# Altium PCB advsensor.PcbDoc (part 1 of 2)
Units mil, origin at the board's own origin, x right, y up, seen from the top; angles counter-clockwise.
Board outline 6000 x 4000 mil, 4 copper layers (Top Layer, Mid-Layer 1, Mid-Layer 2, Bottom Layer); 107 components, 107 nets, 544 pads, 87 vias.
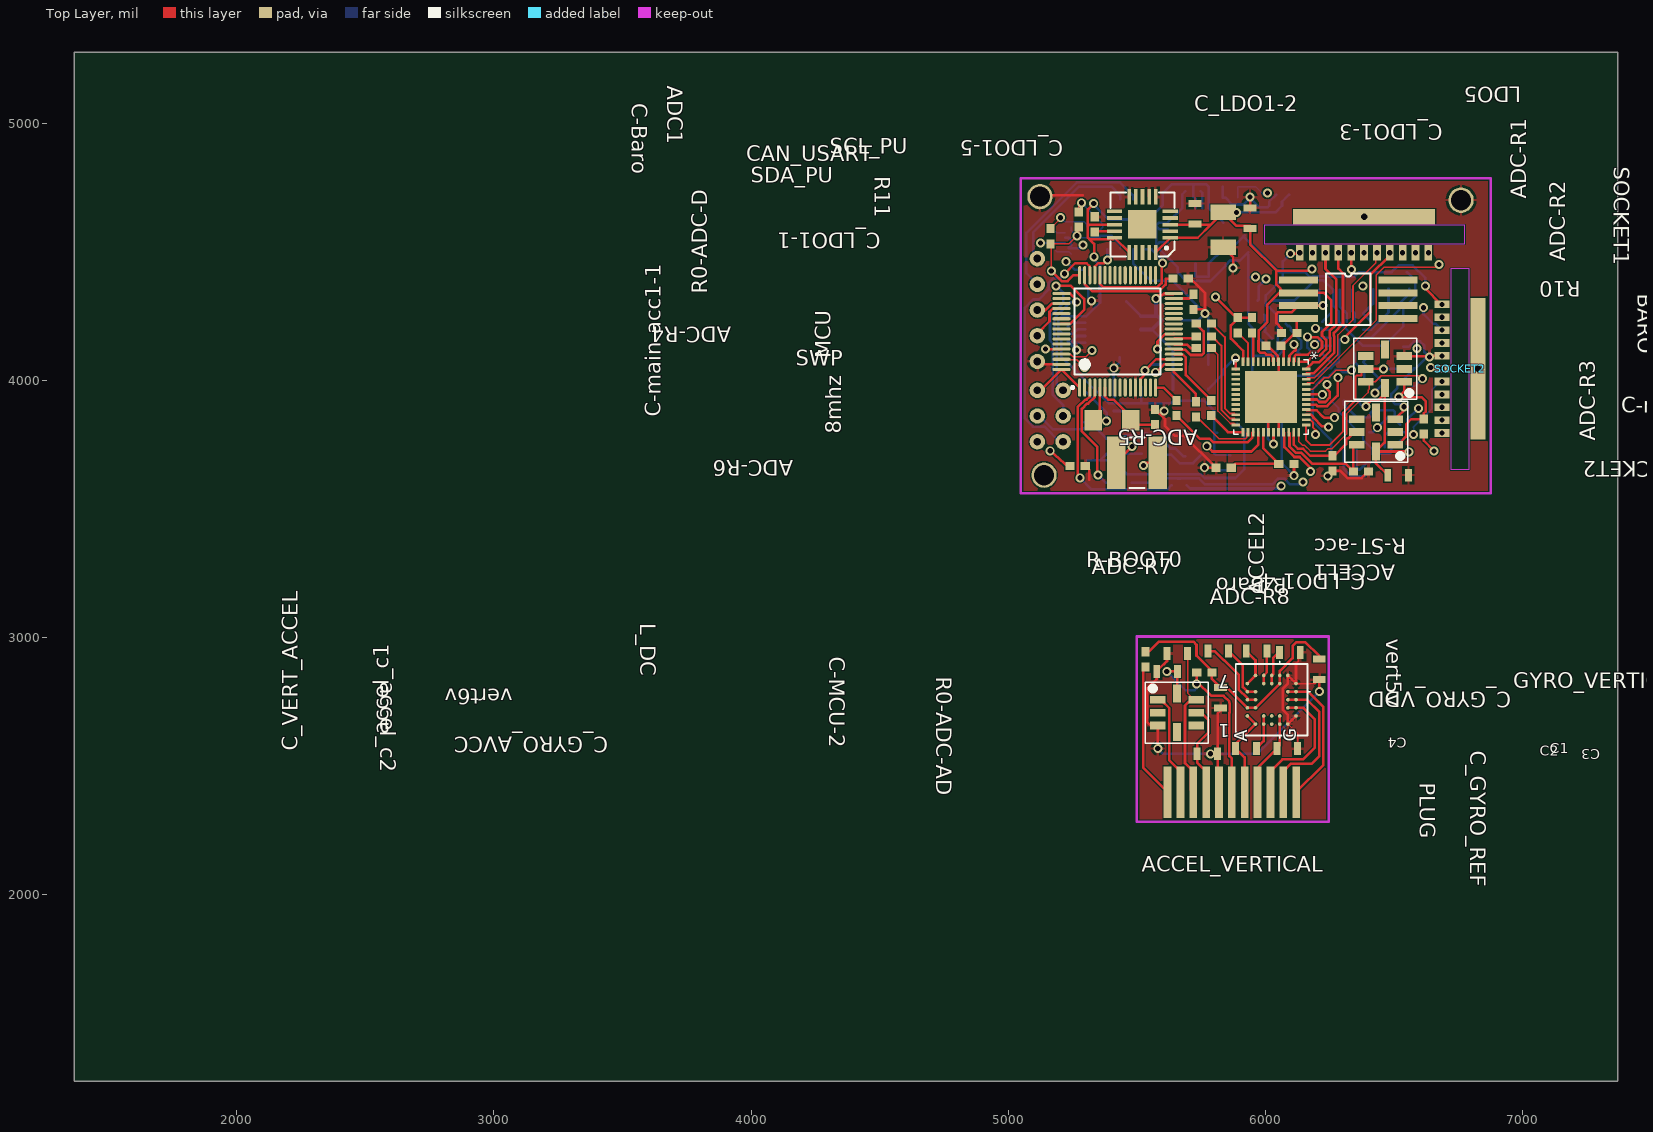
[diagram p0: Top Layer view]
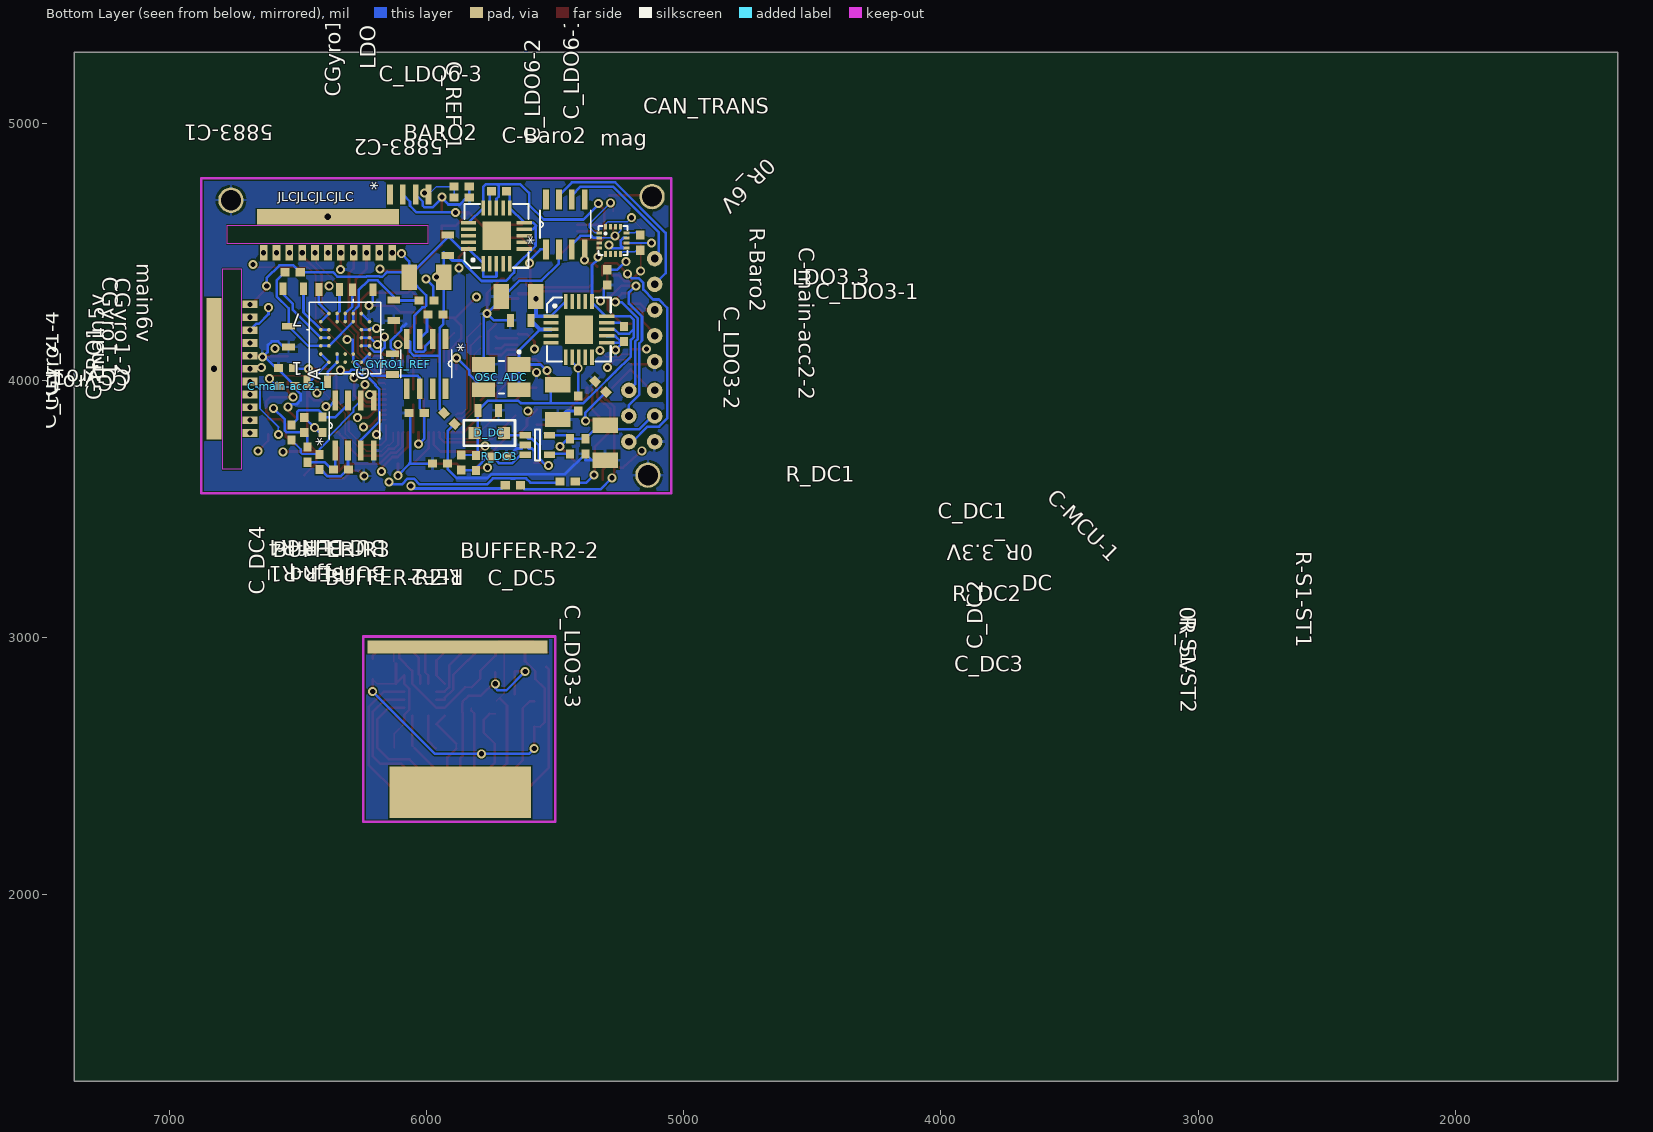
[diagram p1: Bottom Layer view, seen from below]
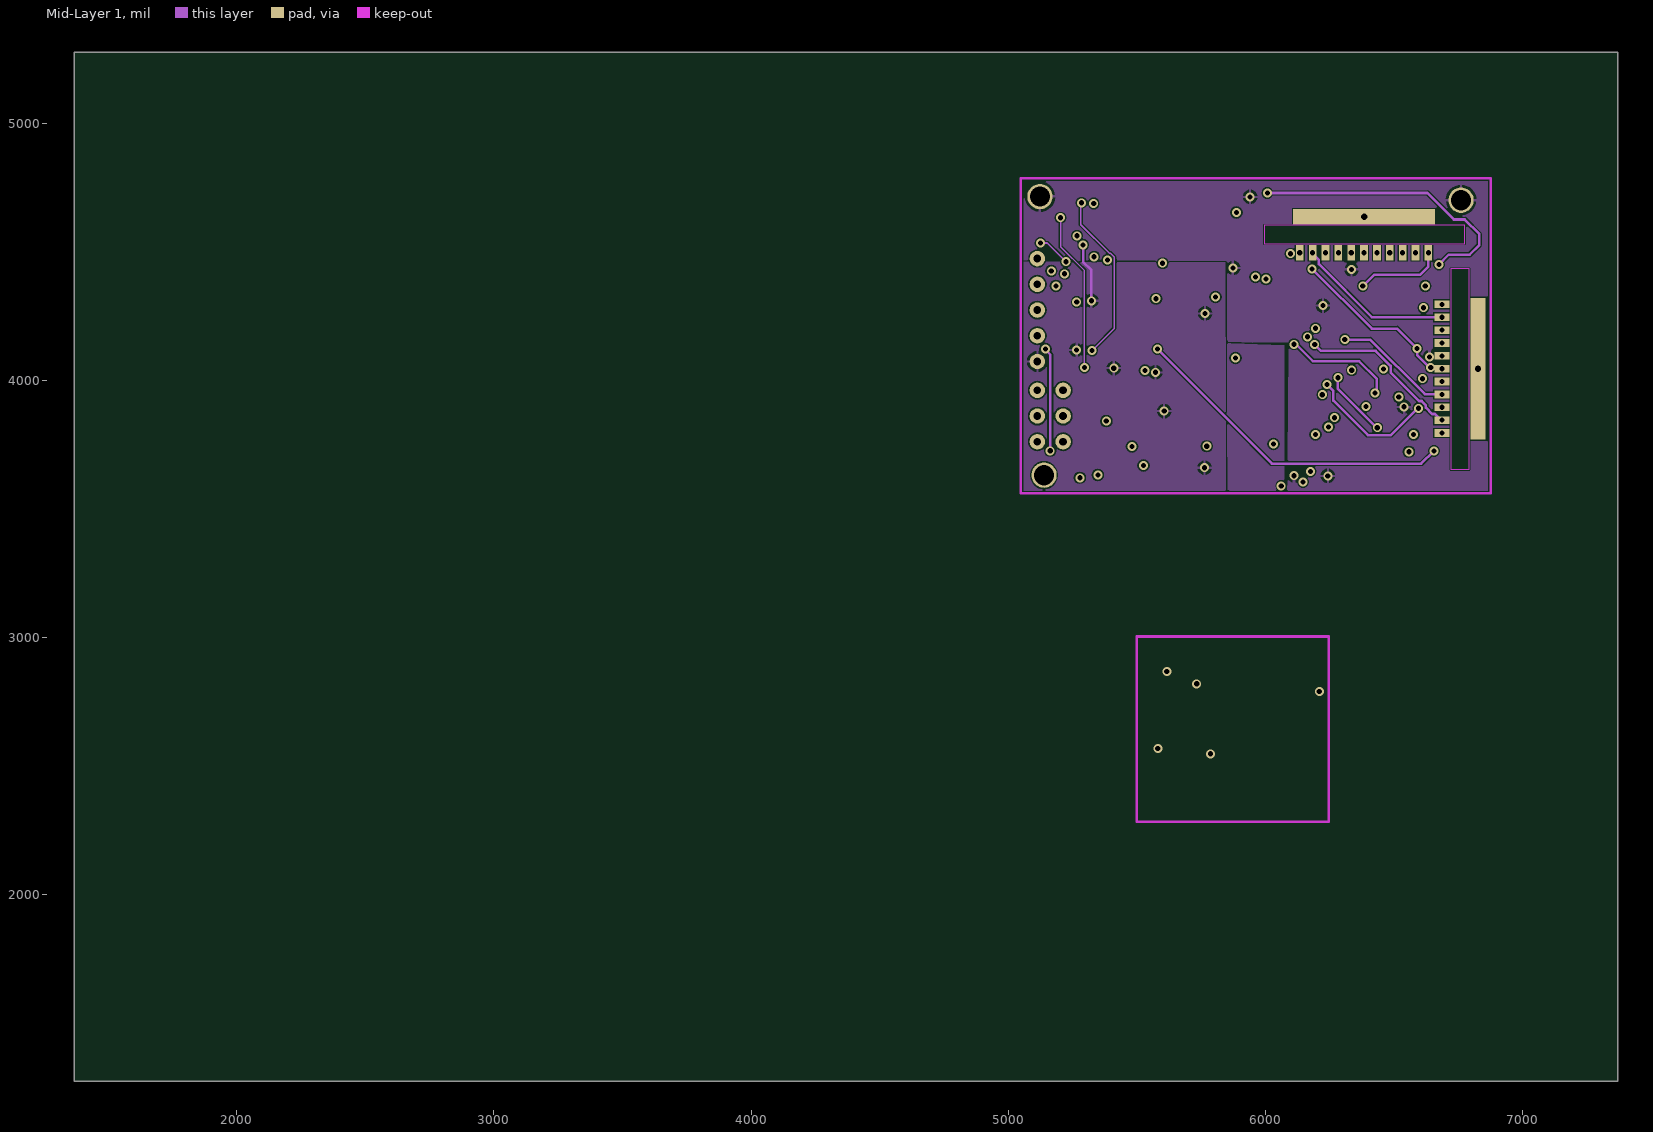
[diagram p2: Mid-Layer 1]
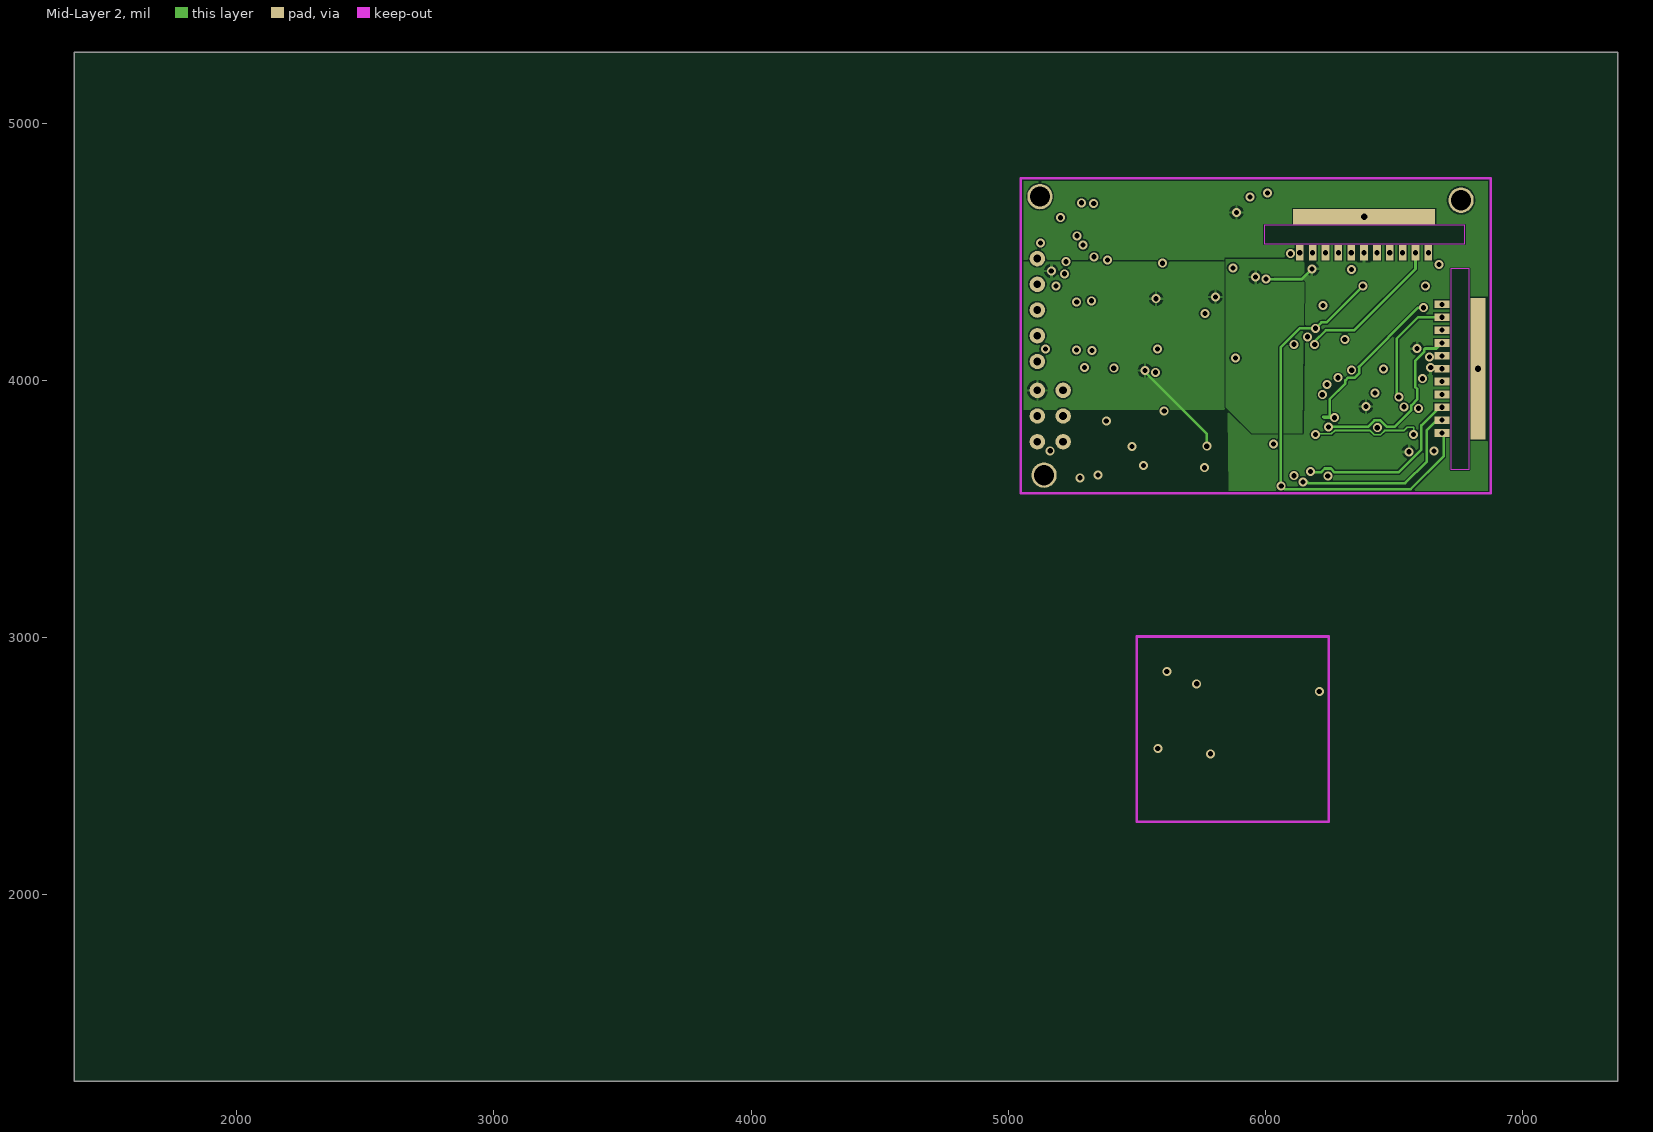
[diagram p3: Mid-Layer 2]

## Layer stack, top to bottom
Top Layer: signal copper 1.4
Dielectric: core 12.6, FR-4, Dk 4.8
Mid-Layer 1: signal copper 1.4
Dielectric: prepreg 12.6, FR-4, Dk 4.8
Mid-Layer 2: signal copper 1.4
Dielectric: core 12.6, FR-4, Dk 4.8
Bottom Layer: signal copper 1.4

## Board outline
1369,1275 7369,1275 7369,5275 1369,5275

## Design rules (kind name [scope] priority, off if disabled: settings)
Clearance [All] p1: gap=6
MinimumSolderMaskSliver [All] p1 off: minsoldermaskwidth=10
PolygonConnect [All] p1: connectstyle=Relief reliefconductorwidth=10 reliefentries=4 polygonreliefangle="90 Angle" airgapwidth=10
RoomDefinition power [InComponentClass('power')] p1: confinementstyle=ConfineIn formatcopy=TRUE lockcomponents=FALSE outline 5021,3500 4275,3500 4275,3039 5021,3039
RoomDefinition advsensor_vertical [InComponentClass('advsensor_vertical')] p2: confinementstyle=ConfineIn formatcopy=TRUE lockcomponents=FALSE outline 5008,2797 4663,2797 4663,2647 5008,2647
RoomDefinition advsensor_main [InComponentClass('advsensor_main')] p3: confinementstyle=ConfineIn formatcopy=TRUE lockcomponents=FALSE outline 7341,3515 6901,3515 6901,3019 7341,3019
RoutingVias [All] p1: holewidth=20 width=35 viastyle="Through Hole" minholewidth=20 minwidth=35 maxholewidth=20 maxwidth=50
SilkToSilkClearance [All] p1 off: silktosilkclearance=10
SilkToSolderMaskClearance [IsPad] p1 off: minsilkscreentomaskgap=10 clearancetoexposedcopper=TRUE
SolderMaskExpansion [All] p1: expansion=2.05
Width Width_1 [All] p1: maxlimit=20 minlimit=6 preferedwidth=10
Width PowerLineWidth [(InNet('GND') OR InNet('GND-3.3') OR InNet('GND-5.0') OR InNet('GND-6.0') OR InNet('GND-DC') OR InNet('VCC') OR InNet('VCC5V') OR InNet('VCC6V') OR InNet('VCC-3.3'))] p2: maxlimit=10 minlimit=10 preferedwidth=10
25 further rules are at their usual default settings.

## Classes and differential pairs
component class advsensor_main: 8mhz 5883-C1 5883-C2 ACCEL1 ACCEL2 ADC1 ADC-R1 ADC-R2 ADC-R3 ADC-R4 ADC-R5 ADC-R6 ADC-R7 ADC-R8 BARO BARO2 buffer BUFFER-R1 BUFFER-R2-1 BUFFER-R2-2 BUFFER-R3 BUFFER-R4 C-Baro C-Baro2 C-Buffer C-main-acc1-1 C-main-acc1-2 C-main-acc2-1 C-main-acc2-2 C-MCU-1 C-MCU-2 C_GYRO1_REF CAN_TRANS CAN_USART CGyro1-1 CGyro1-2 CGyro1-3 CGyro1-4 CGyro1-AVCC CGyro1-VDD GYRO1 mag main5v main6v MCU OSC_ADC R0-ADC-AD R0-ADC-D R10 R11 R-Baro R-Baro2 R-BOOT0 R-S1-ST1 R-S1-ST2 R-ST-acc SCL_PU SDA_PU SOCKET1 SOCKET2 SWP
component class advsensor_vertical: accel_c1 accel_c2 ACCEL_VERTICAL C1 C2 C3 C4 C_GYRO_AVCC C_GYRO_REF C_GYRO_VDD C_VERT_ACCEL GYRO_VERTICAL PLUG vert5v vert6v
component class power: 0R_3.3V 0R_5V 0R_6V C_DC1 C_DC2 C_DC3 C_DC4 C_DC5 C_LDO1-1 C_LDO1-2 C_LDO1-3 C_LDO1-4 C_LDO1-5 C_LDO3-1 C_LDO3-2 C_LDO3-3 C_LDO6-1 C_LDO6-2 C_LDO6-3 C_REF_1 C_REF_2 D_DC DC L_DC LDO3.3 LDO5 LDO6 R_DC1 R_DC2 R_DC3 REF2

## Components (designator, comment, footprint, x,y, rotation, side; value= is the part's Value field where it differs from the comment)
0R_3.3V "" "0603 - no" 5410,3910 r270 bottom
0R_5V "" "0603 - no" 5947,3676 r180 bottom
0R_6V "" "0603 - no" 5910.93,3851.25 r225 bottom
8mhz "XTAL" 5032 5403,3845 r180 top
5883-C1 "" "0603 - no" 5297,4400 r270 bottom
5883-C2 "" "0603 - no" 5169,4535 r270 bottom
ACCEL1 "ADXL203CE" ADXL203 6504,3849 r180 top
ACCEL2 "ADXL203CE" ADXL203 6539,4094 r180 top
accel_c1 "Cap" 0805 5774,2548 r180 top
accel_c2 "Cap" 0805 5657,2938 r0 top
ACCEL_VERTICAL "ADXL203CE" ADXL203 5581,2658 r0 top
ADC1 "ADS1258_RTC_48" "RTC48_5P1X5P1 - weak" 6021,3935 r270 top
ADC-R1 "" "0603 - no" 5760,4220 r180 top
ADC-R2 "" "0603 - no" 5760,4170 r180 top
ADC-R3 "" "0603 - no" 5760,4125 r180 top
ADC-R4 "" "0603 - no" 5654,3892 r270 top
ADC-R5 "" "0603 - no" 5729,3887 r270 top
ADC-R6 "" "0603 - no" 5789,3892 r270 top
ADC-R7 "" "0603 - no" 5892,4214 r90 top
ADC-R8 "" "0603 - no" 5947,4214 r90 top
BARO "MPXH6115" MPXH6115 6128,4390 r0 top
BARO2 "MPXH6115" "D8 - HALF" 6067,4819 r90 bottom
buffer "OPA2227" D8 6280,3824 r90 bottom
BUFFER-R1 "" "0603 - no" 6415,3682 r270 bottom
BUFFER-R2-1 "" "0603 - no" 6332,3653 r0 bottom
BUFFER-R2-2 "" "0603 - no" 6524,3797 r270 bottom
BUFFER-R3 "" "0603 - no" 6463,3711 r90 bottom
BUFFER-R4 "" "0603 - no" 6404,3827 r270 bottom
C1 "Cap" 0805 5816,2947 r0 top
C2 "Cap" 0805 5965,2947 r0 top
C3 "Cap" 0805 6095,2942 r180 top
C4 "Cap" 0805 5924,2569 r180 top
C-Baro "" "0603 - no" 6092,4184 r0 top
C-Baro2 "" "0603 - no" 5863,4710 r0 bottom
C-Buffer "" "0603 - no" 6475,3826 r270 bottom
C-main-acc1-1 "" "0603 - no" 6371,3646 r180 top
C-main-acc1-2 "" "0603 - no" 6261,3677 r90 top
C-main-acc2-1 "" "0603 - no" 6541,3977 r0 bottom
C-main-acc2-2 "" "0603 - no" 6546,4047 r180 bottom
C-MCU-1 "" "0603 - no" 5323,3975 r225 bottom
C-MCU-2 "" "0603 - no" 5571,3857 r270 top
C_DC1 "" 1210 5305,3757 r90 bottom
C_DC2 "" "0603 - no" 5381.77,3743.35 r90 bottom
C_DC3 "" "0603 - no" 5864.77,3680.35 r90 bottom
C_DC4 "" 0805 5760,3882 r0 bottom
C_DC5 "" 1210 5490,3915 r90 bottom
C_GYRO1_REF "" 0805 6132,4063 r90 bottom
C_GYRO_AVCC "" 0805 5825,2766 r270 top
C_GYRO_REF "" 0805 6085,2569 r0 top
C_GYRO_VDD "" 0805 6209,2877 r270 top
C_LDO1-1 "" "0603 - no" 5336,4606 r270 top
C_LDO1-2 "Cap2" 1210 5835,4585 r90 top
C_LDO1-3 "" 0805 5940,4630 r270 top
C_LDO1-4 "" 0805 6515,3631 r180 top
C_LDO1-5 "" 0805 5726,4648 r270 top
C_LDO3-1 "" "0603 - no" 5232,4180 r90 bottom
C_LDO3-2 "Cap2" 1210 5642,4326 r180 bottom
C_LDO3-3 "" 0805 5634,4233 r180 bottom
C_LDO6-1 "" "0603 - no" 5718,4735 r0 bottom
C_LDO6-2 "Cap2" 1210 6000,4401 r0 bottom
C_LDO6-3 "" 0805 5917,4525 r90 bottom
C_REF_1 "" "0603 - no" 5965,4255 r180 bottom
C_REF_2 "" "0603 - no" 6038,3873 r0 bottom
C_VERT_ACCEL "" 0805 5617,2868 r180 top
CAN_TRANS "SN65HVD230_D_8" D8 5460,4606 r90 bottom
CAN_USART "5P" 5P 5113,4173 r90 top
CGyro1-1 "Cap" 0805 6518,4356 r180 bottom
CGyro1-2 "Cap" 0805 6378,4353 r180 bottom
CGyro1-3 "" 0805 6248,4352 r0 bottom
CGyro1-4 "Cap" 0805 6424,3994 r0 bottom
CGyro1-AVCC "" 0805 6536,4170 r270 bottom
CGyro1-VDD "" 0805 6127,4272 r270 bottom
D_DC "Diode" Diode-SOD123 5755.77,3795.35 r0 bottom
DC "LM27313XMF/NOPB" DBV0005A 5568.77,3748.35 r180 bottom
GYRO1 "ADXRS620BBGZ" BG_32_3 6316,4165 r90 bottom
GYRO_VERTICAL "ADXRS620BBGZ" BG_32_3 6024,2758 r90 top
L_DC "Inductor Iron Dot" GDNR5040 5500,3680 r0 top
LDO3.3 "TPS7A4700" "TPS7A4700 - b" 5506,4249 r180 bottom
LDO5 "TPS7A4700" "TPS7A4700 - b" 5620,4554 r180 top
LDO6 "TPS7A4700" "TPS7A4700 - b" 5779,4463 r90 bottom
mag "HMC5883" HMC5883 5328,4573 r180 bottom
main5v "" "0603 - no" 6000,4310 r0 bottom
main6v "" "0603 - no" 6520,4420 r180 bottom
MCU "STM32F103RBT6" LQFP64_N 5425,4190 r90 top
OSC_ADC "OSC" SMD4_5X32 5709,4012 r270 bottom
PLUG "HUGE3" BIG 5819,2399 r0 top
R0-ADC-AD "" "0603 - no" 6081,3675 r0 top
R0-ADC-D "" "0603 - no" 5837,3660 r180 top
R10 "" "0603 - no" 5720,4305 r270 top
R11 "" "0603 - no" 5670,4395 r0 top
R-Baro "" "0603 - no" 6030.84,4134 r180 top
R-Baro2 "" "0603 - no" 5863,4753 r180 bottom
R-BOOT0 "" "0603 - no" 5269.7,3667 r0 top
R-S1-ST1 "" "0603 - no" 5451,3606 r180 bottom
R-S1-ST2 "" "0603 - no" 5664,3592 r180 bottom
R-ST-acc "" "0603 - no" 6615,3820 r270 top
R_DC1 "" "0603 - no" 5441.77,3743.35 r90 bottom
R_DC2 "" "0603 - no" 5806.77,3678.35 r90 bottom
R_DC3 "" "0603 - no" 5717.77,3704.35 r0 bottom
REF2 "MAX6350" D8 6001,4064 r270 bottom
SCL_PU "" "0603 - no" 5274,4625 r90 top
SDA_PU "" "0603 - no" 5164,4560 r90 top
SOCKET1 "HUGE3" "BIG - socket2" 6333,4542 r0 top
SOCKET2 "HUGE3" "BIG - socket2" 6732,4095 r270 top
SWP "SWPConnector" SWPConnector 5113,3861 r90 top
vert5v "" "0603 - no" 5762,2864 r0 top
vert6v "" "0603 - no" 5534,2915 r270 top

## Footprints (in the part's own frame and the unit in brackets; to place one, negate y for a bottom-side part, rotate by r counter-clockwise, add the part's x,y. Pads: shape width x height; smd on the part's side, far side on the other; paste and mask are expansions set on the pad)
5P [mil]
  round 60 hole 30: 1(-100,0) 2(0,0) 3(100,0) 4(200,0) 5(300,0)
"0603 - no" [mm]
  rect 0.9x0.8 smd: 1(-0.75,0) 2(0.75,0)
0805 [mil]
  rect 27x50 smd: 1(-40,0) 2(40,0)
1210 [mm]
  rect 1.52x2.5 smd: 1(-1.715,0) 2(1.715,0)
5032 [mm]
  rect 1.7x2 smd: 1(-1.85,0) 2(1.85,0)
ADXL203 [mil]
  rect 60x30 smd: 1(0,100) 2(0,50) 3(0,0) 5(150,0) 6(150,50) 7(150,100)
  rect 30x70 smd: 4(75,-25) 8(75,125)
  silkscreen extent -49,-69 197,167
BG_32_3 [mil]
  round 14 smd: A2(-62.99,94.49) A3(-31.5,94.49) A4(0,94.49) A5(31.5,94.49) A6(62.99,94.49) B1(-94.49,62.99) B3(-31.5,62.99) B4(0,62.99) B5(31.5,62.99) B7(94.49,62.99) C1(-94.49,31.5) C2(-62.99,31.5) C6(62.99,31.5) C7(94.49,31.5) D1(-94.49,0) D2(-62.99,0) D6(62.99,0) D7(94.49,0) E1(-94.49,-31.5) E2(-62.99,-31.5) E6(62.99,-31.5) E7(94.49,-31.5) F1(-94.49,-62.99) F3(-31.5,-62.99) F4(0,-62.99) F5(31.5,-62.99) F7(94.49,-62.99) G2(-62.99,-94.49) G3(-31.5,-94.49) G4(0,-94.49) G5(31.5,-94.49) G6(62.99,-94.49)
  silkscreen extent -149,-149 149,149
BIG [mil]
  rect 30x200 smd: 1(-150,0) 2(-100,0) 3(-50,0) 4(100,0) 5(150,0) 6(200,0) 6V(-200,0) 7(250,0) 8(300,0) VCC(50,0) VSS(0,0)
  rect 551.18x200 smd far side: FREE(50,0)
"BIG - socket2" [mil]
  rect 30x59.06 hole 20: 1(-150,-46) 2(-100,-46) 3(-50,-46) 4(100,-46) 5(150,-46) 6(200,-46) 6V(-200,-46) 7(250,-46) 8(300,-46) VCC(50,-46) VSS(0,-46)
  rect 551.18x59.06 hole 25: FREE(50,94)
  Keep-Out Layer region: -338.15,-11.06 441.3,-11.06 441.3,59.8 -338.15,59.8
D8 [mil]
  rect 78x22 smd: 1(-97,75) 2(-97,25) 3(-97,-25) 4(-97,-75) 5(97,-75) 6(97,-25) 7(97,25) 8(97,75)
  silkscreen extent -54,-98 54,98
"D8 - HALF" [mil]
  rect 78x22 smd: 1(-97,75) 2(-97,25) 3(-97,-25) 4(-97,-75)
DBV0005A [mm]
  rect 1.1x0.65 smd paste-0.102 mask+0.051: 1(-1.2,0.95) 2(-1.2,0) 3(-1.2,-0.95) 4(1.2,-0.95) 5(1.2,0.95)
  silkscreen extent -0.25,-1.55 0.25,1.55
Diode-SOD123 [mm]
  rect 1.2x1.2 smd: 1(-1.45,0) 2(1.45,0)
  silkscreen extent -2.54,-1.27 2.54,1.27
GDNR5040 [mm]
  rect 1.85x5.2 smd: 1(-2.05,0) 2(2.05,0)
  silkscreen extent -0.75,-2.5 0.75,2.5
HMC5883 [mm]
  rect 0.575x0.3 smd: 1(0,0) 2(0,-0.5) 3(0,-1) 4(0,-1.5) 9(2.7,-1.5) 10(2.7,-1) 11(2.7,-0.5) 12(2.7,0)
  rect 0.3x0.575 smd: 5(0.6,-2.1) 6(1.1,-2.1) 7(1.6,-2.1) 8(2.1,-2.1) 13(2.1,0.6) 14(1.6,0.6) 15(1.1,0.6) 16(0.6,0.6)
  silkscreen extent -0.09,-2.19 2.79,0.69
LQFP64_N [mm]
  oval 1.8x0.3 smd: 1(-5.55,3.75) 2(-5.55,3.25) 3(-5.55,2.75) 4(-5.55,2.25) 5(-5.55,1.75) 6(-5.55,1.25) 7(-5.55,0.75) 8(-5.55,0.25) 9(-5.55,-0.25) 10(-5.55,-0.75) 11(-5.55,-1.25) 12(-5.55,-1.75) 13(-5.55,-2.25) 14(-5.55,-2.75) 15(-5.55,-3.25) 16(-5.55,-3.75) 33(5.55,-3.75) 34(5.55,-3.25) 35(5.55,-2.75) 36(5.55,-2.25) 37(5.55,-1.75) 38(5.55,-1.25) 39(5.55,-0.75) 40(5.55,-0.25) 41(5.55,0.25) 42(5.55,0.75) 43(5.55,1.25) 44(5.55,1.75) 45(5.55,2.25) 46(5.55,2.75) 47(5.55,3.25) 48(5.55,3.75)
  oval 0.3x1.8 smd: 17(-3.75,-5.55) 18(-3.25,-5.55) 19(-2.75,-5.55) 20(-2.25,-5.55) 21(-1.75,-5.55) 22(-1.25,-5.55) 23(-0.75,-5.55) 24(-0.25,-5.55) 25(0.25,-5.55) 26(0.75,-5.55) 27(1.25,-5.55) 28(1.75,-5.55) 29(2.25,-5.55) 30(2.75,-5.55) 31(3.25,-5.55) 32(3.75,-5.55) 49(3.75,5.55) 50(3.25,5.55) 51(2.75,5.55) 52(2.25,5.55) 53(1.75,5.55) 54(1.25,5.55) 55(0.75,5.55) 56(0.25,5.55) 57(-0.25,5.55) 58(-0.75,5.55) 59(-1.25,5.55) 60(-1.75,5.55) 61(-2.25,5.55) 62(-2.75,5.55) 63(-3.25,5.55) 64(-3.75,5.55)
  silkscreen extent -5.67,-4.25 4.25,4.57
MPXH6115 [mm]
  rect 3.81x0.69 smd: 1(0,0) 2(0,-1.27) 3(0,-2.54) 4(0,-3.81) 5(9.83,-3.81) 6(9.83,-2.54) 7(9.83,-1.27) 8(9.83,0)
  silkscreen extent 2.74,-4.44 7.09,0.64
"RTC48_5P1X5P1 - weak" [mm]
  rect 0.85x0.28 smd paste-0.14: 1(-3.475,2.75) 2(-3.475,2.25) 3(-3.475,1.75) 4(-3.475,1.25) 5(-3.475,0.75) 6(-3.475,0.25) 7(-3.475,-0.25) 8(-3.475,-0.75) 9(-3.475,-1.25) 10(-3.475,-1.75) 11(-3.475,-2.25) 12(-3.475,-2.75) 25(3.475,-2.75) 26(3.475,-2.25) 27(3.475,-1.75) 28(3.475,-1.25) 29(3.475,-0.75) 30(3.475,-0.25) 31(3.475,0.25) 32(3.475,0.75) 33(3.475,1.25) 34(3.475,1.75) 35(3.475,2.25) 36(3.475,2.75)
  rect 0.28x0.85 smd paste-0.14: 13(-2.751,-3.475) 14(-2.251,-3.475) 15(-1.75,-3.475) 16(-1.25,-3.475) 17(-0.75,-3.475) 18(-0.25,-3.475) 19(0.25,-3.475) 20(0.75,-3.475) 21(1.25,-3.475) 22(1.75,-3.475) 23(2.251,-3.475) 24(2.751,-3.475) 37(2.751,3.475) 38(2.251,3.475) 39(1.75,3.475) 40(1.25,3.475) 41(0.75,3.475) 42(0.25,3.475) 43(-0.25,3.475) 44(-0.75,3.475) 45(-1.25,3.475) 46(-1.75,3.475) 47(-2.251,3.475) 48(-2.751,3.475)
  rect 5.1x5.1 smd paste-2.537 mask-2.54: 49(0,0)
  silkscreen extent -3.68,-3.68 3.68,3.68
SMD4_5X32 [mm]
  rect 1.45x2.25 smd: 1(-1.25,1.75) 2(-1.25,-1.75) 3(1.25,-1.75) 4(1.25,1.75)
  silkscreen extent -2.62,-0.25 1.6,1.87
SWPConnector [mil]
  round 60 hole 30: 1(-100,0) 2(0,0) 3(100,0) 4(-100,-100) 5(0,-100) 6(100,-100)
"TPS7A4700 - b" [mm]
  rect 2.8x2.8 smd: 0(2.515,-1.321)
  rect 1.5x0.35 smd: 1(-0.25,0) 2(-0.25,-0.65) 3(-0.25,-1.3) 4(-0.25,-1.95) 5(-0.25,-2.6) 11(5.25,-2.6) 12(5.25,-1.95) 13(5.25,-1.3) 14(5.25,-0.65) 15(5.25,0)
  rect 0.35x1.5 smd: 6(1.2,-4.05) 7(1.85,-4.05) 8(2.5,-4.05) 9(3.15,-4.05) 10(3.8,-4.05) 16(3.8,1.45) 17(3.15,1.45) 18(2.5,1.45) 19(1.85,1.45) 20(1.2,1.45)
  silkscreen extent -0.65,-4.45 5.65,1.85

## Part data
0R_3.3V 0R_5V 0R_6V ADC-R1 ADC-R2 ADC-R3 ADC-R4 ADC-R5 ADC-R6 ADC-R7 ADC-R8 BUFFER-R1 BUFFER-R2-1 BUFFER-R2-2 BUFFER-R3 BUFFER-R4 main5v main6v R0-ADC-AD R0-ADC-D R10 R11 R-Baro R-Baro2 R-BOOT0 R-S1-ST1 R-S1-ST2 R-ST-acc R_DC1 R_DC2 R_DC3 SCL_PU SDA_PU vert5v vert6v: library part Res2, "Resistor"
8mhz: "Crystal Oscillator"
5883-C1 5883-C2: library part "Cap Semi", "Capacitor (Semiconductor SIM Model)"
ACCEL1 ACCEL2 ACCEL_VERTICAL ADC1 CAN_TRANS DC GYRO1 GYRO_VERTICAL: "Imported"
accel_c1 accel_c2 C1 C2 C3 C4 C_LDO1-2 C_LDO3-2 C_LDO6-2 CGyro1-1 CGyro1-2 CGyro1-4: "Capacitor"
C-Baro C-Baro2 C-Buffer C-main-acc1-1 C-main-acc1-2 C-main-acc2-1 C-main-acc2-2 C-MCU-1 C-MCU-2 C_DC2 C_DC3 C_DC4 C_GYRO1_REF C_GYRO_AVCC C_GYRO_REF C_GYRO_VDD C_LDO1-1 C_LDO1-3 C_LDO1-4 C_LDO1-5 C_LDO3-1 C_LDO3-3 C_LDO6-1 C_LDO6-3 C_REF_1 C_REF_2 C_VERT_ACCEL CGyro1-3 CGyro1-AVCC CGyro1-VDD: library part Cap, "Capacitor"
C_DC1 C_DC5: library part Cap2, "Capacitor"
D_DC: "Default Diode"
L_DC: "Magnetic-Core Inductor with Winding Polarity Marking"
MCU: "STM32 ARM-based 32-bit MCU with 128 Kbytes Flash, 64-pin LQFP, Industrial Temperature"

## Free pads (board coordinates)
  round 98.43 hole 78.74: 0(5139,3631) 1(6760,4700) 2(5123,4714)
  rect 700x50 smd far side: 0(5879,2963)

## Via types
v1: diameter 35, hole 20, Top Layer to Bottom Layer, 87 vias

## Nets (pads, with @x,y where several pads share a name; then routed paths per layer and width w, separated by ;. In a path a pad name is that pad's centre, name@x,y a point inside that pad or via, vN(x,y) a via of type N, cw(c..) or ccw(c..) an arc to the next point about the centre after c; other vN are vias at no path point)
DC_OUT: C_DC3.2 C_DC4.2 C_DC5.2 D_DC.2 LDO3.3.13 LDO3.3.15 LDO3.3.16 LDO5.13 LDO5.15 LDO5.16 LDO6.13 LDO6.15 LDO6.16 R_DC2.2 | length 2972.7
  Top Layer w10: v1(5332,4687) 5309.25,4664.25 5309.25,4598.74 ; v1(5333.78,4479.93) 5333.78,4529.67 5315.7,4547.76 ; LDO5.13@5413.31,4605.18 5315.7,4605.19 5309.25,4598.74 ; LDO5.16@5470.39,4496.91 LDO5.15@5413.31,4554 5407.06,4547.76 5315.7,4547.76 ; 5309.25,4598.74 5309.25,4554.2 5315.7,4547.76
  Bottom Layer w10: LDO3.3.13@5299.31,4197.82 5269.31,4197.82 5252.3,4180.81 5211.7,4180.81 5194,4198.51 ; v1(5332,4687) 5332,4683 5390,4625 5544,4625 5601,4682 5601,4728 5634.75,4761.75 5725.26,4761.75 ; v1(5333.78,4479.93) 5333.78,4470.22 5356.39,4447.61 LDO3.3.16@5356.39,4306.09 5356.39,4302.09 5303.31,4249 LDO3.3.15@5299.31,4249 5209,4249 5194,4234 5194,4198.51 ; C_DC5.2@5516,3975.52 5516,3910.81 ; LDO6.13@5727.82,4669.69 5727.82,4705.69 5718.81,4714.7 5718.81,4755.3 5725.26,4761.75 ; R_DC2.2@5800,3714.65 D_DC.2@5800,3795.35 ; R_DC2.2@5806.83,3709.81 C_DC3.2@5862.77,3707.88 ; D_DC.2@5812.85,3795.35 D_DC.2@5800,3795.35 ; LDO6.16@5836.09,4612.61 LDO6.15@5779,4669.69 5779,4752.55 5769.8,4761.75 5725.26,4761.75 ; 5194,4198.51 5194,4167.73 5205.25,4156.48 5205.25,4092.75 5266.35,4031.65 5267.5,4031.65 5337.93,3961.22 5339.29,3961.22 5389.7,3910.81 5516,3910.81 ; 5516,3910.81 5633.18,3910.81 5642.37,3920 5762,3920 C_DC4.2@5800,3882 D_DC.2@5800,3795.35
GND-3.3: 0R_3.3V.1 5883-C1.2 C-MCU-1.1 C-MCU-2.1 C_LDO3-1.1 C_LDO3-2.1 C_LDO3-3.1 CAN_TRANS.2 CAN_USART.1 LDO3.3.7 LDO3.3.8 LDO3.3.11 LDO3.3.12 mag.9 mag.11 MCU.12 MCU.18 MCU.63 OSC_ADC.2 R0-ADC-D.2 R10.2 R11.2 R-BOOT0.2 | length 2358.8
  Top Layer w10: CAN_USART.1@5113,4073 5123.95,4062.05 MCU.63@5206.5,4062.05 ; v1@5291,4522 v1(5291,4526) ; R-BOOT0.2@5299.23,3667 5315,3651.23 5315,3613 ; C-MCU-2.1@5571,3886.53 5609,3848.53 5609,3822.37 5647.37,3784 5683.47,3784 R0-ADC-D.2@5807.47,3660 v1(5763,3660) ; v1(5572,4031) 5575,4031 5606.05,4062.05 MCU.18@5643.5,4062.05 ; R11.2@5699.53,4395 5708.55,4395 5764.53,4339.02 v1@5764.53,4275.47 ; R10.2@5720,4275.47 v1@5764.53,4275.47 ; v1@5764.53,4260.47 v1@5764.53,4275.47
  Mid-Layer 1 w10: v1(5291,4526) 5291,4460 5323,4428 v1(5323,4309)
  Bottom Layer w10: mag.11@5221.7,4553.31 5234.8,4553.31 5234.8,4550.54 5237.58,4550.54 5244.02,4544.09 5244.02,4523.17 5237.58,4516.72 5234.8,4516.72 5234.8,4513.94 5278.94,4513.94 v1(5291,4526) ; v1(5264.47,4118) C_LDO3-1.1@5235.84,4146.64 ; 5883-C1.2@5297,4370.47 5310,4357.47 5310,4322 v1(5323,4309) ; LDO3.3.11@5299.31,4146.64 C_LDO3-1.1@5235.84,4146.64 ; LDO3.3.12@5299.31,4172.23 5266.35,4172.23 5244.59,4150.47 C_LDO3-1.1@5232,4150.47 C_LDO3-1.1@5235.84,4146.64 ; 0R_3.3V.1@5414.53,3935 0R_3.3V.1@5410,3939.53 v1(5410,4047) 5433.17,4070.17 LDO3.3.7@5433.17,4089.55 ; CAN_TRANS.2@5485,4509 5485,4454 5552,4387 5638,4387 v1(5765,4260) ; v1@5572,4020.93 v1(5572,4031) ; C_LDO3-3.1@5674,4233 5738,4233 v1(5765,4260) ; OSC_ADC.2@5777.9,4061.21 5777.9,4247.1 v1(5765,4260)
  other v1: 5606,3880
GND-5.0: 0R_5V.1 ACCEL1.3 ACCEL2.3 ADC1.5 ADC1.30 ADC1.32 ADC1.49 BARO2.3 BARO.3 buffer.4 C-Baro2.1 C-Baro.1 C-main-acc1-1.1 C-main-acc1-2.1 C-main-acc2-1.1 C-main-acc2-2.1 C_GYRO1_REF.2 C_LDO1-1.1 C_LDO1-2.1 C_LDO1-3.1 C_LDO1-4.1 C_LDO1-5.1 C_REF_2.2 CGyro1-3.1 CGyro1-AVCC.2 CGyro1-VDD.2 GYRO1.F1 GYRO1.F7 GYRO1.G2 GYRO1.G6 LDO5.6 LDO5.7 LDO5.10 pad.1 pad.2 R0-ADC-AD.2 R-Baro2.2 R-Baro.2 SOCKET1.VSS SOCKET2.VSS | length 3001.7
  Top Layer w10: pad.2@5123,4714 5127.5,4718.5 5288.81,4718.5 ; C_LDO1-2.1@5835,4517.48 5874,4478.48 v1(5874,4437) ; C_LDO1-3.1@5940,4659.53 C_LDO1-3.1@5940,4670 v1(5940,4713) ; R-Baro.2@6001.31,4134 6009.4,4134 6047.35,4096.04 6047.35,4074.98 ADC1.5@6050.53,4071.81 ADC1.49@6050.53,3964.53 ; ADC1.30@6011.16,3798.19 ADC1.49@6011.16,3925.16 ; ADC1.32@6050.53,3798.19 ADC1.49@6050.53,3905.47 ; C-Baro.1@6062.47,4184 6062.47,4201.39 6042,4221.86 6042,4258.14 6048.44,4264.58 6102.58,4264.58 BARO.3@6128,4290 v1(6223,4290) ; R0-ADC-AD.2@6110.53,3675 6110.53,3629.47 v1(6111,3629) ; v1(6242,3628.47) C-main-acc1-2.1@6261,3647.47 6290.98,3647.47 6319.2,3619.25 6373.78,3619.25 C-main-acc1-1.1@6400.53,3646 C-main-acc1-1.1@6411.69,3646 ; SOCKET1.VSS@6333,4492 6333,4432 v1(6334,4431) ; ACCEL1.3@6504,3849 6551.91,3896.91 v1(6538,3896.91) ; ACCEL2.3@6539,4094 6633,4094 v1(6637,4090) ; v1@6632,4095 SOCKET2.VSS@6682,4095
  Bottom Layer w10: R-Baro2.2@5833.47,4753 C-Baro2.1@5833.47,4710 5843.51,4710 5870.25,4683.25 5914.8,4683.25 v1@5940,4708.45 ; v1(5940,4713) v1@5940,4708.45 ; 0R_5V.1@5976.53,3676 6067.53,3676 ; BARO2.3@6042,4722 6014,4694 6014,4678.44 6007.56,4672 5976.44,4672 v1@5940,4708.44 ; C_REF_2.2@6067.53,3873 6062.25,3867.72 6062.25,3681.28 6067.53,3676 ; 6078,4220 6087,4211 6091.56,4211 6098,4204.56 6098,4193.69 6139.5,4152.19 6139.5,4128.19 C_GYRO1_REF.2@6122.81,4111.5 ; v1(6111,3629) 6111,3630 6067.53,3673.47 6067.53,3676 ; C_GYRO1_REF.2@6123.5,4111.5 C_GYRO1_REF.2@6132,4103 ; CGyro1-3.1@6208,4352 6208,4305 v1(6223,4290) ; GYRO1.G2@6221.51,4102.01 GYRO1.F1@6253.01,4070.51 ; GYRO1.G6@6221.51,4227.99 GYRO1.F7@6253.01,4259.49 GYRO1.F7@6253.01,4259.99 ; CGyro1-AVCC.2@6536,4130 6555.69,4130 6577.19,4151.5 6600.81,4151.5 6617.5,4134.81 6617.5,4109.5 v1(6637,4090) ; v1(6538,3896.91) 6528.66,3906.25 6506.05,3906.25 6489.36,3922.95 6489.36,3946.56 6511.47,3968.67 C-main-acc2-1.1@6511.47,3977 6575.53,4041.05 C-main-acc2-2.1@6575.53,4047 6584,4047 v1@6632,4095
GND-6.0: 0R_6V.1 C_LDO6-1.1 C_LDO6-2.1 C_LDO6-3.1 C_REF_1.2 LDO6.6 LDO6.7 LDO6.9 LDO6.10 LDO6.11 REF2.4 | length 1696.9
  Top Layer w10: v1(5961,4401) v1@5969.69,4401
  Bottom Layer w10: LDO6.7@5619.55,4535.83 5587.83,4535.83 5575,4523 ; LDO6.9@5619.55,4587.02 5587.98,4587.02 5575,4600 ; C_LDO6-1.1@5688.47,4735 5676.64,4723.17 LDO6.11@5676.64,4669.69 LDO6.10@5619.55,4612.61 5585.61,4612.61 5574,4601 5575,4600 ; 0R_6V.1@5931.81,3872.13 5948,3888.32 5948,4095.58 ; C_LDO6-3.1@5932,4497 5900.5,4465.5 5862.19,4465.5 5845.5,4448.81 5845.5,4445.87 5785.63,4386 5744.21,4386 5744,4386.21 5691.61,4386.21 5658.75,4419.07 5658.75,4439.25 5575,4523 ; C_LDO6-3.1@5932.48,4487.99 C_LDO6-2.1@5932.48,4401 ; v1(5961,4401) C_LDO6-2.1@5932.48,4401 ; REF2.4@6076,4161 6064,4149 6064,4110.82 6048.18,4095 5948.58,4095 5948,4095.58 ; 5575,4523 5575,4600 ; C_LDO6-2.1@5932.48,4401 5932.48,4257.99 C_REF_1.2@5935.47,4255 5935.47,4217.08 5948,4204.56 5948,4095.58
GND-ADC-D: ADC1.29 R0-ADC-AD.1 R0-ADC-D.1 | length 339.2
  Top Layer w10: R0-ADC-D.1@5866.53,3660 5881.53,3675 R0-ADC-AD.1@6051.47,3675 5991.47,3735 ADC1.29@5991.47,3798.19
GND-DC: 0R_3.3V.2 0R_5V.2 0R_6V.2 C_DC1.1 C_DC2.1 C_DC4.1 C_DC5.1 DC.2 pad.0@5139,3631 R_DC3.1 SWP.1 | length 1114.4
  Bottom Layer w10: C_DC1.1@5305,3689.48 5357.42,3689.48 ; 5383.4,3689.48 5357.42,3689.48 ; 0R_3.3V.2@5410,3880.47 5457.01,3880.47 C_DC5.1@5490,3847.48 ; 5583.36,3728.3 5589.8,3734.75 5602.41,3734.75 DC.2@5616.01,3748.35 5629.62,3734.75 5649.95,3734.75 5680.34,3704.35 R_DC3.1@5688.24,3704.35 ; 0R_6V.2@5890.05,3830.37 5917.47,3802.95 0R_5V.2@5917.47,3676 5917.47,3654.51 5883.07,3620.11 5762.58,3620.11 5747.95,3634.75 5664.63,3634.75 5664,3634.12 5663.37,3634.75 5460.85,3634.75 C_DC2.1@5381.77,3713.83 5357.42,3689.48
Net8mhz_1: 8mhz.1 C-MCU-2.2 MCU.6 | length 267.4
  Top Layer w10: MCU.6@5375.79,3971.5 5375.79,3937.74 5388.47,3925.06 5409.77,3925.06 8mhz.1@5474.83,3860 ; 8mhz.1@5475.83,3845 5493.36,3827.47 C-MCU-2.2@5571,3827.47
Net8mhz_2: 8mhz.2 C-MCU-1.2 MCU.5 | length 329.4
  Top Layer w10: 8mhz.2@5329.17,3860 5356.1,3886.94 MCU.5@5356.1,3971.5 ; 8mhz.2@5330.17,3845 5377,3845 v1(5381,3841)
  Bottom Layer w10: C-MCU-1.2@5302.12,3954.12 5383.25,3872.99 5383.25,3858.2 5387,3854.45 5387,3841 v1(5381,3841)
Net5883-C1_1: 5883-C1.1 mag.10 | length 316
  Mid-Layer 1 w6: v1(5124.63,4533.63) 5151.37,4533.63 v1(5224,4461)
  Bottom Layer w6: v1(5124.63,4533.63) mag.10@5221.7,4533.63 mag.10@5219.26,4531.19 ; v1(5224,4461) v1@5227,4461
  Bottom Layer w10: v1@5227,4461 5258.47,4429.53 5883-C1.1@5297,4429.53
Net5883-C2_1: 5883-C2.1 mag.12 | length 38.6
  Bottom Layer w6: 5185,4577.53 5189.53,4573 mag.12@5221.7,4573
Net5883-C2_2: 5883-C2.2 mag.8 | length 67.2
  Bottom Layer w6: 5883-C2.2@5184,4504.47 5189.43,4499.04 5236.61,4499.04 mag.8@5245.32,4490.32
NetACCEL1_1: ACCEL1.1 ACCEL2.1 R-ST-acc.1 SOCKET1.1 SOCKET2.1 | length 1502.9
  Top Layer w10: ACCEL1.1@6504,3749 6505.5,3750.5 6516.06,3750.5 6546.5,3780.94 6546.5,3828.8 6566.19,3848.5 6613.97,3848.5 R-ST-acc.1@6615,3849.53 6615,3870.7 6623.5,3879.2 6623.5,3917.5 6606.25,3934.75 v1(6517.86,3934.75) 6516.75,3934.75 6539,3957 ACCEL2.1@6539,3994 ACCEL2.1@6539.73,3993.27 ; v1@6504,3934 v1@6516.22,3921.78
  Mid-Layer 1 w10: SOCKET1.1@6183,4492 6207,4468 6207,4451.47 6413.47,4245 SOCKET2.1@6682,4245
  Mid-Layer 2 w10: v1(6517.86,3934.75) 6516.75,3934.75 6516,3934 6510,3940 6510,4162 6593,4245 SOCKET2.1@6682,4245
NetACCEL1_6: ACCEL1.6 ADC1.35 C-main-acc1-2.2 | length 361.2
  Top Layer w10: ADC1.35@6109.58,3798.19 6109.58,3749.42 6125.25,3733.75 6146.06,3733.75 6173.28,3706.53 C-main-acc1-2.2@6261,3706.53 6267.77,3706.53 6313,3751.76 6313,3768.56 6319.44,3775 6323.1,3775 6337,3788.9 6337,3792.56 6343.44,3799 ACCEL1.6@6354,3799
NetACCEL1_7: ACCEL1.7 ADC1.34 C-main-acc1-1.2 | length 453.3
  Top Layer w10: ADC1.34@6089.9,3798.19 6093.07,3795.02 6093.07,3743.3 6118.62,3717.75 6139.43,3717.75 6181.18,3676 6240.51,3676 6240.7,3676.19 6311.28,3676.19 C-main-acc1-1.2@6341.47,3646 6341.47,3736.47 ACCEL1.7@6354,3749
NetACCEL2_6: ACCEL2.6 ADC1.37 C-main-acc2-2.2 | length 647.3
  Top Layer w8: ADC1.37@6157.81,3826.7 6157.81,3767.19 6177,3748 6248,3748 6302,3802 6302,3874.38 6349,3921.38 6349,4013.14 6354.86,4019 6372.54,4019 6373.14,4019.61 6373.14,4037.29 ACCEL2.6@6379.86,4044
  Top Layer w10: ACCEL2.6@6389,4044 v1(6458,4044)
  Bottom Layer w10: v1(6458,4044) 6513.47,4044 C-main-acc2-2.2@6516.47,4047
NetACCEL2_7: ACCEL2.7 ADC1.36 C-main-acc2-1.2 | length 782.6
  Top Layer w6: ADC1.36@6129.27,3798.19 6129.27,3761.73 6143.25,3747.75 6151.85,3747.75 6174.6,3725 6178.66,3724 6208,3724 6233.28,3725 6241.52,3733.24 6257.24,3733.24 6315,3791 6315,3817.73 6315,3869 6398.5,3952.5 6398.5,3960.98 6404,3966.48 6404,3979 ACCEL2.7@6389,3994 6426.27,3994 6449.77,4017.5 6468.98,4017.5 6469.48,4018 6595,4018 v1@6598,4015
  Bottom Layer w6: C-main-acc2-1.2@6570.53,3977 6581,3977 v1(6610,4006)
Netaccel_c1_1: accel_c1.1 accel_c2.1 ACCEL_VERTICAL.3 C3.1 C_GYRO_AVCC.2 C_GYRO_REF.2 C_GYRO_VDD.2 C_VERT_ACCEL.2 GYRO_VERTICAL.F1 GYRO_VERTICAL.F7 GYRO_VERTICAL.G2 GYRO_VERTICAL.G6 PLUG.VSS | length 2213.9
  Top Layer w6: ACCEL_VERTICAL.3@5558,2653 ACCEL_VERTICAL.3@5581,2653 ; accel_c1.1@5814,2548 accel_c1.1@5815,2549 ; C_GYRO_AVCC.2@5825,2715.5 C_GYRO_AVCC.2@5825,2726 ; GYRO_VERTICAL.F1@6086.99,2663.51 6125,2625.5 C_GYRO_REF.2@6125,2569 ; GYRO_VERTICAL.G6@6118.49,2820.99 6192.99,2820.99 C_GYRO_VDD.2@6209,2837 ; 6118.49,2898.51 6126.5,2906.52 6126.5,2937.5 C3.1@6137,2948
  Top Layer w10: ACCEL_VERTICAL.3@5558,2653 5540,2671 5540,2801 5577,2838 C_VERT_ACCEL.2@5577,2868 5577,2869.3 5604.19,2896.5 5605.5,2896.5 5617,2908 accel_c2.1@5617,2938 ; v1(5581,2569) ACCEL_VERTICAL.3@5581,2653 ; v1(5786.5,2548) accel_c1.1@5814,2548 5814,2404 PLUG.VSS@5819,2399 ; accel_c1.1@5815,2549 5815,2705.5 C_GYRO_AVCC.2@5825,2715.5 ; GYRO_VERTICAL.G2@6118.49,2695.01 GYRO_VERTICAL.F1@6086.99,2663.51 6086.99,2699.01 6067,2719 6067,2801.5 6086.99,2821.5 GYRO_VERTICAL.F7@6086.99,2852.49 GYRO_VERTICAL.G6@6118.49,2820.99 6118.49,2898.51 ; v1(6209,2790) C_GYRO_VDD.2@6209,2837
  Bottom Layer w10: v1(5581,2569) 5602,2548 v1(5786.5,2548) 5967,2548 v1(6209,2790)
Netaccel_c1_2: accel_c1.2 ACCEL_VERTICAL.6 PLUG.3 | length 370.2
  Top Layer w6: ACCEL_VERTICAL.6@5731,2703 ACCEL_VERTICAL.6@5755,2703
  Top Layer w10: ACCEL_VERTICAL.6@5755,2703 5778,2680 5778,2631 5734,2587 accel_c1.2@5734,2548 5734,2514.56 5769,2479.56 PLUG.3@5769,2399
Netaccel_c2_2: accel_c2.2 ACCEL_VERTICAL.7 PLUG.2 | length 584.2
  Top Layer w6: accel_c2.2@5697,2938 5697,2784.52 ACCEL_VERTICAL.7@5728.52,2753
  Top Layer w10: ACCEL_VERTICAL.7@5712.79,2761.21 5687,2735.42 5687,2511.56 5710,2488.56 5710,2408 PLUG.2@5719,2399
NetACCEL_VERTICAL_1: ACCEL_VERTICAL.1 PLUG.1 | length 400.4
  Top Layer w10: ACCEL_VERTICAL.1@5581,2753 5598,2753 5626,2725 5626,2522.56 5663,2485.56 5663,2405 PLUG.1@5669,2399
NetACCEL_VERTICAL_8: ACCEL_VERTICAL.8 C_VERT_ACCEL.1 PLUG.VCC vert5v.1 | length 847.7
  Top Layer w10: v1(5616,2868) C_VERT_ACCEL.1@5657,2868 ACCEL_VERTICAL.8@5657,2779 ; vert5v.1@5732.47,2864 5732.47,2829.53 5789,2773 5837,2773 5859.5,2750.5 5859.5,2745.56 5861,2744.06 5861,2707.94 5859.5,2706.44 5859.5,2539.44 5869,2529.94 PLUG.VCC@5869,2399
  Bottom Layer w10: v1(5616,2868) 5689,2795 5724,2795 5732.47,2803.47 v1(5732.47,2820)
NetADC1_2: ADC1.2 GYRO1.F3 GYRO1.G3 | length 382.6
  Top Layer w10: ADC1.2@6109.58,4071.81 6112.76,4074.98 6112.76,4093.1 6119.2,4099.54 6165.87,4099.54 6176.83,4110.5 6202.81,4110.5 6219.5,4127.19 6219.5,4150.81 6202.81,4167.5 6164.5,4167.5 v1(6163,4169)
  Bottom Layer w10: v1(6163,4169) 6162.5,4168.5 6162.5,4127.19 6179.19,4110.5 6202.81,4110.5 6221.51,4129.21 GYRO1.G3@6221.51,4133.5 GYRO1.F3@6253.01,4133.5
NetADC1_3: ADC1.3 CGyro1-4.2 GYRO1.A2 GYRO1.B1 | length 745.4
  Top Layer w10: ADC1.3@6089.9,4071.81 6093.07,4074.98 6093.07,4096.04 6112.57,4115.54 6115.51,4115.54 6118,4118.03 6118,4140 v1(6111,4140)
  Mid-Layer 1 w10: v1(6111,4140) 6118,4140 6184,4074 6364,4074 6432,4006 6432,3957 v1(6425,3950)
  Bottom Layer w10: GYRO1.A2@6410.49,4102.01 GYRO1.B1@6378.99,4070.51 6455.5,3994 CGyro1-4.2@6464,3994 6425,3955 v1(6425,3950)
NetADC1_4: ADC1.4 BARO.4 C-Baro.2 R-Baro.1 | length 187
  Top Layer w10: ADC1.4@6070.21,4071.81 6070.21,4139.52 6114.69,4184 C-Baro.2@6121.53,4184 BARO.4@6121.53,4233.53
NetADC1_10: ADC1.10 ADC-R8.1 | length 114.8
  Top Layer w8: ADC-R8.1@5947,4184.47 5952.1,4179.37 ADC1.10@5952.1,4071.81
NetADC1_11: ADC1.11 ADC-R7.1 | length 129.4
  Top Layer w8: ADC-R7.1@5892,4184.47 5932.42,4144.05 ADC1.11@5932.42,4071.81
NetADC1_13: ADC1.13 OSC_ADC.3 | length 213.9
  Top Layer w10: v1(5883,4087) 5884.19,4085.81 ADC1.13@5884.19,4043.29
  Bottom Layer w10: OSC_ADC.3@5777.9,3962.79 5777.9,3966.38 5833.19,4021.67 5833.19,4038.19 5883,4088 v1(5883,4087)
NetADC1_22: ADC1.22 ADC-R1.1 | length 402.9
  Top Layer w8: ADC-R1.1@5789.53,4220 5842,4167.53 5842,3891.58 5863.32,3870.26 5880.01,3870.26 ADC1.22@5884.19,3866.08
NetADC1_23: ADC1.23 ADC-R2.1 | length 374.2
  Top Layer w8: ADC-R2.1@5789.53,4170 5792.13,4170 5828,4134.13 5828,3885.78 5863.21,3850.57 5880.01,3850.57 ADC1.23@5884.19,3846.39
NetADC1_24: ADC1.24 ADC-R3.1 | length 346.6
  Top Layer w6: ADC-R3.1@5789.53,4125 5815,4099.53 5815,3880.39 5863.51,3831.88 5879.01,3831.88 ADC1.24@5884.19,3826.7
NetADC1_25: ADC1.25 ADC-R6.2 | length 150.4
  Top Layer w10: ADC-R6.2@5789,3862.47 5853.28,3798.19 ADC1.25@5912.73,3798.19
NetADC1_26: ADC1.26 ADC-R5.2 | length 260.3
  Top Layer w6: ADC-R5.2@5729,3862.47 5819.02,3772.46 5921.97,3772.46 5927.24,3777.73 5927.24,3793.01 ADC1.26@5932.42,3798.19
NetADC1_27: ADC1.27 ADC-R4.2 | length 368.3
  Top Layer w10: ADC-R4.2@5654,3862.47 5744.37,3772.1 5783.31,3772.1 5796.95,3758.46 5930.49,3758.46 5948.93,3776.9 5948.93,3795.02 ADC1.27@5952.1,3798.19